# Altium PCB ESP32_USBCv1.PcbDoc (part 2 of 3)
Units mil, origin at the board's own origin, x right, y up, seen from the top; angles counter-clockwise.
Board outline 2700 x 1000 mil, 4 copper layers (L1, L2, L3, L4), stack 86.385 mil thick; 65 components, 73 nets, 301 pads, 160 vias.
Unrouted connection lines stored in the file: 5.
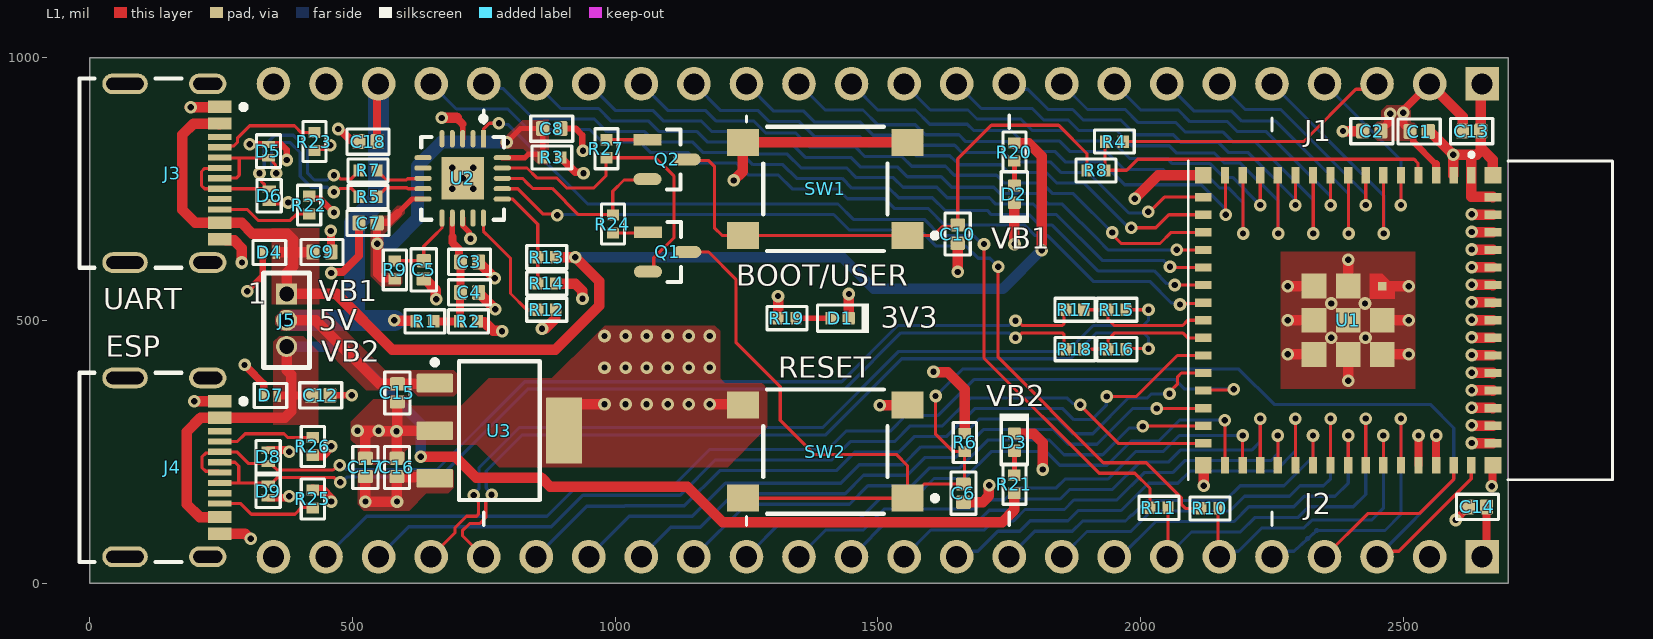
[diagram p0: L1 view]

## Part data (continued)
U3: "IC REG LIN 3.3V 1.5A SOT-223-4", Case/Package=SOP, Dropout Voltage1-Max=550mV, Dropout Voltage1-Nom=340mV, Input Voltage Absolute-Max=20V, LCSC Part No.=C181262, Manufacturer="Texas Instruments", Min Input Voltage=3.8V, Operating Temperature, TJ-Max=125°C, Operating Temperature, TJ-Min=-40°C, Output Current1-Max=1.5A, Output Voltage1-Max=3.4V, Output Voltage1-Min=3.2V, Output Voltage1-Nom=3.3V, Package Body Material=Plastic, Package Shape=Rectangular, Peak Reflow Temperature (Cel)=260°C, Supplier Part Number=296-24897-1-ND, Voltage Tolerance-Max=3%, Adjustability=FIXED, Category="Voltage Regulators - Linear", Channels=1, ComponentLink1Description=https://www.ti.com:443/lit/ds/symlink/tl1963a.pdf?src-supplier=IHS+Markit, ComponentLink1URL=https://www.ti.com:443/lit/ds/symlink/tl1963a.pdf?src-supplier=IHS+Markit, ComponentLink2Description=https://datasheet.ciiva.com/2046/-2046068.pdf?src-supplier=Digikey, ComponentLink2URL=https://datasheet.ciiva.com/2046/-2046068.pdf?src-supplier=Digikey, Height - Seated (Max)=1.8mm, JESD-30 Code=R-PDSO-G4, JESD-609 Code=e3, Length=6.5mm, Manufacturer Part Number=TL1963A-33DCYR, Max Supply Voltage=20V, Moisture Sensitivity Level=2, Number of Outputs=1, Packaging="Tape and Reel", Pins=4, Pricing="1=2.76, 10=2.06, 25=1.8848, 100=1.6922, 250=1.60032, 500=1.54492, 1000=1.49932, 2500=1.45085, 5000=1.42184 (USD)", Qualification Status="Not Qualified", Reach SVHC Compliant=Yes, Regulator Type="FIXED POSITIVE SINGLE OUTPUT LDO REGULATOR", RoHS=Yes, RoHS Compliant=Yes, Stock=5278, Supplier=Digikey, Surface Mount=Yes, Technology=BIPOLAR, Terminal Finish=Tin, Terminal Form="Gull Wing", Terminal Pitch=2.3mm, Terminal Position=DUAL, Width=3.5mm

## Via types
v1: diameter 24, hole 12, L1 to L4, tented both sides, 160 vias

## Nets (pads, with @x,y where several pads share a name; then routed paths per layer and width w, separated by ;. In a path a pad name is that pad's centre, name@x,y a point inside that pad or via, vN(x,y) a via of type N, cw(c..) or ccw(c..) an arc to the next point about the centre after c; other vN are vias at no path point)
+3V3: C1.2 C2.2 C13.2 C14.2 C16.2 C17.2 J1.2 J2.1 R2.1 R3.1 R6.2 R19.2 U1.3 U3.3 | length 6007.2
  L1 w12: C1.2@2512.8,859.17 2518.85,853.13 2518.85,840.15 2561.99,797.01
  L1 w15: R3.1@897.26,809.09 897.26,807.91 899.76,805.41 900.94,805.41 924.63,781.72 938.28,781.72 v1(940,780) ; C2.2@2457.32,860 2457.32,861.57 2470.5,874.75 2470.5,886.06 2475,890.56 v1(2475,893) ; C1.2@2513.7,859.86 2500,873.55 v1(2500,895) 2501.72,896.72 2501.72,901.72 J1.2@2550,950 ; 2561.99,797.01 2561.99,775.96 U1.3@2562.36,775.59 ; J2.1@2650,50 2658.32,58.32 C14.2@2658.32,145
  L1 w20: C17.2@525,202.68 v1(525,155) v1(585,155) 585,200.08 585.98,201.06 655.35,201.06 U3.3@656.97,199.45 ; R2.1@738.01,498 738.01,496.82 738.64,496.19 751.56,496.19 767.98,479.77 784.23,479.77 v1(785,479) ; v1(1310,546) 1310.07,545.93 1310.07,504.07 R19.2@1310.15,504 ; v1(1606,402) 1606.77,401.23 1633.02,401.23 1665.5,368.75 R6.2@1665.5,284.51 ; J1.2@2550,950 2612.66,887.34 C13.2@2612.68,860
  L2 w15: v1(2475,893) v1@2476,894
  L2 w40: v1(585,155) 606.5,155 687.5,236 ; 678,226.5 678,372 v1(785,479) 789.4,479 831,520.6 831,700.4 910.6,780 v1(940,780) 999.58,780 1037.58,818 2411,818 2475,882 v1(2475,893) ; v1(1310,546) 1362,598 1490,598 1555,533 1555,453 v1(1606,402) 1762.6,402 2021.6,143 2374,143 2401,170 2609.4,170 2650,129.4 J2.1@2650,50 ; v1@2482.68,895 v1(2500,895)
  L2 w60: 687.5,236 1197,236 1253.5,292.5 1253.5,489.5 v1(1310,546)
"+3V3 FTDI": C7.2 C8.2 R3.2 R9.1 U2.10 U2.20 | length 843.8
  L1 w10.1: 587,704.07 613.56,730.63 U2.10@634.59,730.63 ; U2.20@785.41,809.37 828.37,809.37 835,816 857.03,816 862.61,810.42 R3.2@862.61,809.72 ; v1(794,839) 819.72,864.72 835,864.72 C8.2@862.3,864.72 862.46,864.57 R3.2@862.46,809.88
  L1 w15: R9.1@581,578.99 556.11,578.99 547.32,587.78 C7.2@547.32,685 547.32,686.51 569.44,686.51 587,704.07
  L4 w25: v1(547.32,645.81) 576.81,645.81 624,693 624,793.29 669.71,839 v1(794,839)
+5V: C15.2 C18.2 J1.22 J5.2 R1.1 U3.1 | length 1164.4
  L1 w15: C18.2@547.32,840 547.32,947.32 J1.22@550,950
  L1 w20: J5.2@375,500 430,500 551,379 C15.2@585.66,379 655.42,379 U3.1@656.97,380.55 ; v1(580,500) 580.77,499.23 620.36,499.23 620.99,498.6 R1.1@620.99,498
  L4 w40: J5.2@375,500 515.41,500 ; 550,865.07 J1.22@550,949.6 ; 550.03,865.03 550.03,730.64 504,684.6 504,511.41 515.41,500 ; v1(580,500) 515.41,500
+5V_VBUS1: C9.2 D4.2 J3.A4B9 J3.B4A9 J5.1 R13.2 R20.2 | length 2636.1
  L1 w20: J3.A4B9@247,873 247,873.77 J3.A4B9@247.64,874.41 197.94,874.41 176.51,852.98 176.51,710.14 201.22,685.43 289.57,685.43 310,665 320,665 376.23,665 387.94,653.28 387.94,629.5 ; D4.2@359.54,629.5 384.74,629.5 ; C9.2@425,630 424.5,629.5 387.94,629.5 ; R13.2@887.01,620 v1(924,620) 970,574 970,527.75 886.26,444 576,444 470,550 J5.1@375,550 375,590 387.94,602.94 387.94,629.5 ; R20.2@1760,837.01 1786.99,837.01 1812,812 v1(1812,633)
  L4 w20: v1(924,620) 1432.1,620 1492.1,560 1738.15,560 v1@1811.15,633
+5V_VBUS2: C12.2 D7.2 J4.A4B9 J4.B4A9 J5.3 R21.2 | length 2217
  L1 w15: D7.2@359,357 384,357 C12.2@422.68,357
  L1 w20: J4.B4A9@247.64,125.59 209.59,125.59 185,150.18 185,288 211.16,314.16 247.24,314.16 J4.A4B9@247.64,314.57 300,314.57 371.57,314.57 384,327 384,357 384,396 375,405 J5.3@375,450 ; v1@631.08,240 695.73,240 735.73,200 860,200 877,183 1137.54,183 1204.71,115.83 1736.83,115.83 1760,139 R21.2@1760,170.99
  L4 w20: J5.3@375,450 483,450 630,303 v1(630,240)
"+VCC FTDI": C3.2 C4.2 R1.2 R2.2 U2.12 | length 254.2
  L1 w6: R2.2@703.99,498 R2.2@704.83,498.83 ; C4.2@704.83,552.16 C4.2@705.68,553 C4.2@706,553
  L1 w10.1: 690.32,659 U2.12@690.32,694.59
  L1 w15: R1.2@655.01,498 R2.2@703.99,498 ; 690.32,659 690.32,647.97 703.11,635.18 703.11,613.57 C3.2@705.68,611 ; R2.2@704.83,498.83 C4.2@704.83,552.16 ; C4.2@705.68,553.32 C3.2@705.68,612.57
"CHIP PU": C6.2 J2.3 Q1.3 R6.1 SW2.1 SW2.2 U1.45 | length 3008.3
  L1 w6: Q1.3@1137.42,630 1178,630 1230,578 1230,458 1314.34,373.66 1314.34,309.66 1379.3,244.7 1535.3,244.7 1556.5,223.5 SW2.1@1556.5,161.42 1347,161.42 SW2.2@1243.5,161.42 ; SW2.1@1561.42,161.42 1588.32,188.32 C6.2@1663,188.32 ; v1(1609.93,355.78) 1609.93,283.01 1642.45,250.49 R6.1@1665,250.49 ; C6.2@1665,193 R6.1@1665,250.49 ; R6.1@1665.5,250.49 R6.1@1665,250.49 ; J2.3@2450,50 2460.33,60.33 2491.33,60.33 2629.29,198.29 U1.45@2629.29,224.41
  L4 w6: v1(1609.93,355.78) 1661.15,407 2187.14,407 2254.21,339.94 2551.06,339.94 2596,295 2596,196 J2.3@2450,50
CON1_USB_N: D5.2 J3.A7 J3.B7 R5.1 | length 501.2
  L1 w6.03: J3.A7@247.64,770.08 248.1,770.54 279.15,770.54 284.78,776.17 284.78,808.47 ; J3.B7@247.64,809.45 248.62,808.47 284.78,808.47 ; v1(355.48,779.61) 353.87,781.22 353.87,795.7 349.3,800.28 349.3,805.2 345.42,809.07 D5.2@340.5,809.07 339.9,808.47 284.78,808.47 ; v1(465,744) 469.86,744 476.86,751 498.17,751 512.99,736.18 R5.1@512.99,735
  L4 w6.03: v1(355.48,779.61) 355.48,783.14 346.5,792.13 346.5,826 358.5,838 382.16,838 400.97,819.19 400.97,774.03 422.02,752.99 452.48,752.99 461.47,744 v1(465,744)
CON1_USB_P: D6.2 J3.A6 J3.B6 R7.1 | length 554.2
  L1 w6.03: J3.B6@247.64,750.39 247.39,750.14 219.14,750.14 213.09,756.2 213.09,783.09 219,789 246.87,789 J3.A6@247.64,789.76 ; J3.B6@247.89,750.39 248.14,750.14 340.98,750.14 336.66,750.14 333.04,753.76 333.04,758.08 326.35,764.78 326.35,776.75 v1(323.48,779.61) ; v1(465,776) 469.86,776 476.86,769 498.17,769 512.99,783.82 R7.1@512.99,785
  L4 w6.03: v1(323.48,779.61) 323.48,783.14 332.47,792.13 332.47,831.81 352.69,852.03 387.97,852.03 415,825 415,779.84 427.83,767.01 452.48,767.01 461.47,776 v1(465,776)
CON2_USB_N: D8.2 J4.A7 J4.B7 R17.2 | length 1874.6
  L1 w6.03: J4.B7@226.92,247.16 J4.B7@239.08,247.16 ; J4.B7@226.89,247.19 220.78,247.19 213.99,240.39 213.99,219.45 220.78,212.66 245.22,212.66 J4.A7@247.64,210.24 ; J4.B7@239.11,247.19 245.22,247.19 J4.B7@247.64,249.61 280.39,249.61 302.8,227.2 D8.2@340,227.2 344.92,227.2 348.8,223.33 348.8,223.04 356.84,215 463.48,215 472.48,224 v1(476,224) ; v1(1762,499) 1765.53,499 1774.52,490.01 1850.93,490.01 1854.46,493.55 1854.46,516.47 R17.2@1857.99,520
  L4 w6.03: v1(476,224) 480.55,224 488.52,216.03 661.19,216.03 828.19,383.03 1431.19,383.03 1538.17,490.01 1749.48,490.01 1758.47,499 v1(1762,499)
CON2_USB_P: D9.2 J4.A6 J4.B6 R18.2 | length 1838.5
  L1 w6.03: J4.B6@247.64,190.55 337.24,190.55 D9.2@340,187.8 ; J4.A6@247.64,229.92 276.71,229.92 283.9,222.73 283.9,191.06 ; D9.2@344.92,187.8 358.1,200.97 464.81,200.97 473.75,192.03 v1(477.33,192.03) ; v1(1762,467) 1765.53,467 1774.52,475.99 1850.93,475.99 1854.46,472.45 1854.46,448.53 R18.2@1857.99,445
  L4 w6.03: v1(477.33,192.03) 480.1,192.03 490.07,202 667,202 834,369 1437,369 1543.99,475.99 1749.48,475.99 1758.47,467 v1(1762,467)
CONN_ESP_USB_N: J2.21 R15.2 | length 1678.8
  L1 w6.03: J2.21@650,50 695.48,95.48 695.48,105.32 717.3,127.14 736.47,127.14 740,130.67 740,154.48 731,163.48 v1(731,167) ; R15.2@1972.01,520 v1(2015,520)
  L4 w6.03: v1(731,167) 731,169.53 740.99,179.52 740.99,218.99 818,296 1395.16,296 1539.85,440.7 1860.87,440.7 1910.21,490.03 2005.03,490.03 2015,500 v1(2015,520)
CONN_ESP_USB_P: J2.20 R16.2 | length 1655.9
  L1 w6.03: J2.20@750,50 709.51,90.49 709.51,99.51 723.11,113.11 742.28,113.11 754.03,124.86 754.03,155.48 765,166.45 v1(765,168) ; R16.2@1972.01,445 1972.01,445.99 v1(2015,445.99)
  L4 w6.03: v1(765,168) 765,170.53 755.01,180.52 755.01,213.17 823.81,281.97 1400.97,281.97 1545.67,426.67 1866.68,426.67 1916.02,476 2006,476 2015,467 v1(2015,445.99)
"DTR FTDI": Q2.2 R24.1 U2.18 | length 359.5
  L1 w6: U2.18@785.41,770 823.92,770 833,760.92 842.92,751 880.27,751 930.27,701 R24.1@995.01,701 ; R24.1@996,700.01 995.5,700.5 995.5,745.5 1017,767 1059.98,767 Q2.2@1061.58,768.6
ESP_USB_N: R15.1 R17.1 U1.23 | length 254.5
  L1 w6.03: R17.1@1892.01,520 R15.1@1937.99,520 1937.99,502.01 1950,490 2080,490 2090,500 U1.23@2119.45,500
ESP_USB_P: R16.1 R18.1 U1.24 | length 254.8
  L1 w6.03: R18.1@1892.01,445 R16.1@1937.99,445 1937.99,463.08 1950.88,475.97 2080,475.97 2089.43,466.54 U1.24@2119.45,466.54
FTDI_RESET: C5.2 R9.2 U2.11 | length 150.7
  L1 w6: R9.2@581,613.01 581.16,613.17 635.84,613.17 C5.2@636,613.32 636,641 654,659 670.63,675.63 U2.11@670.63,694.59
FTDI_USB_N: R5.2 U2.9 | length 96.3
  L1 w6.03: R5.2@547.01,735 547.01,736.18 554.62,743.8 555.8,743.8 564.32,752.31 603.69,752.31 605.68,750.32 U2.9@634.59,750.32
FTDI_USB_P: R7.2 U2.8 | length 97
  L1 w6.03: R7.2@547.01,785 547.01,783.82 554.62,776.2 555.8,776.2 564.99,767.01 603.01,767.01 605.33,769.33 633.91,769.33 U2.8@634.59,770